# Altium PCB uTCA_MCH_PCB3.pcbdoc (part 3 of 8)
Units mm, origin at the board's own origin, x right, y up, seen from the top; angles counter-clockwise.
Board outline 182.75 x 75.8 mm, 10 copper layers (Top Layer, GND1, MidLayer1, PWR1, Mid-Layer 2, GND2, PWR2, Mid-Layer 3, GND3, Bottom Layer), stack 1.568 mm thick; 778 components, 977 nets, 4756 pads, 1214 vias.
Unrouted connection lines stored in the file: 1790.
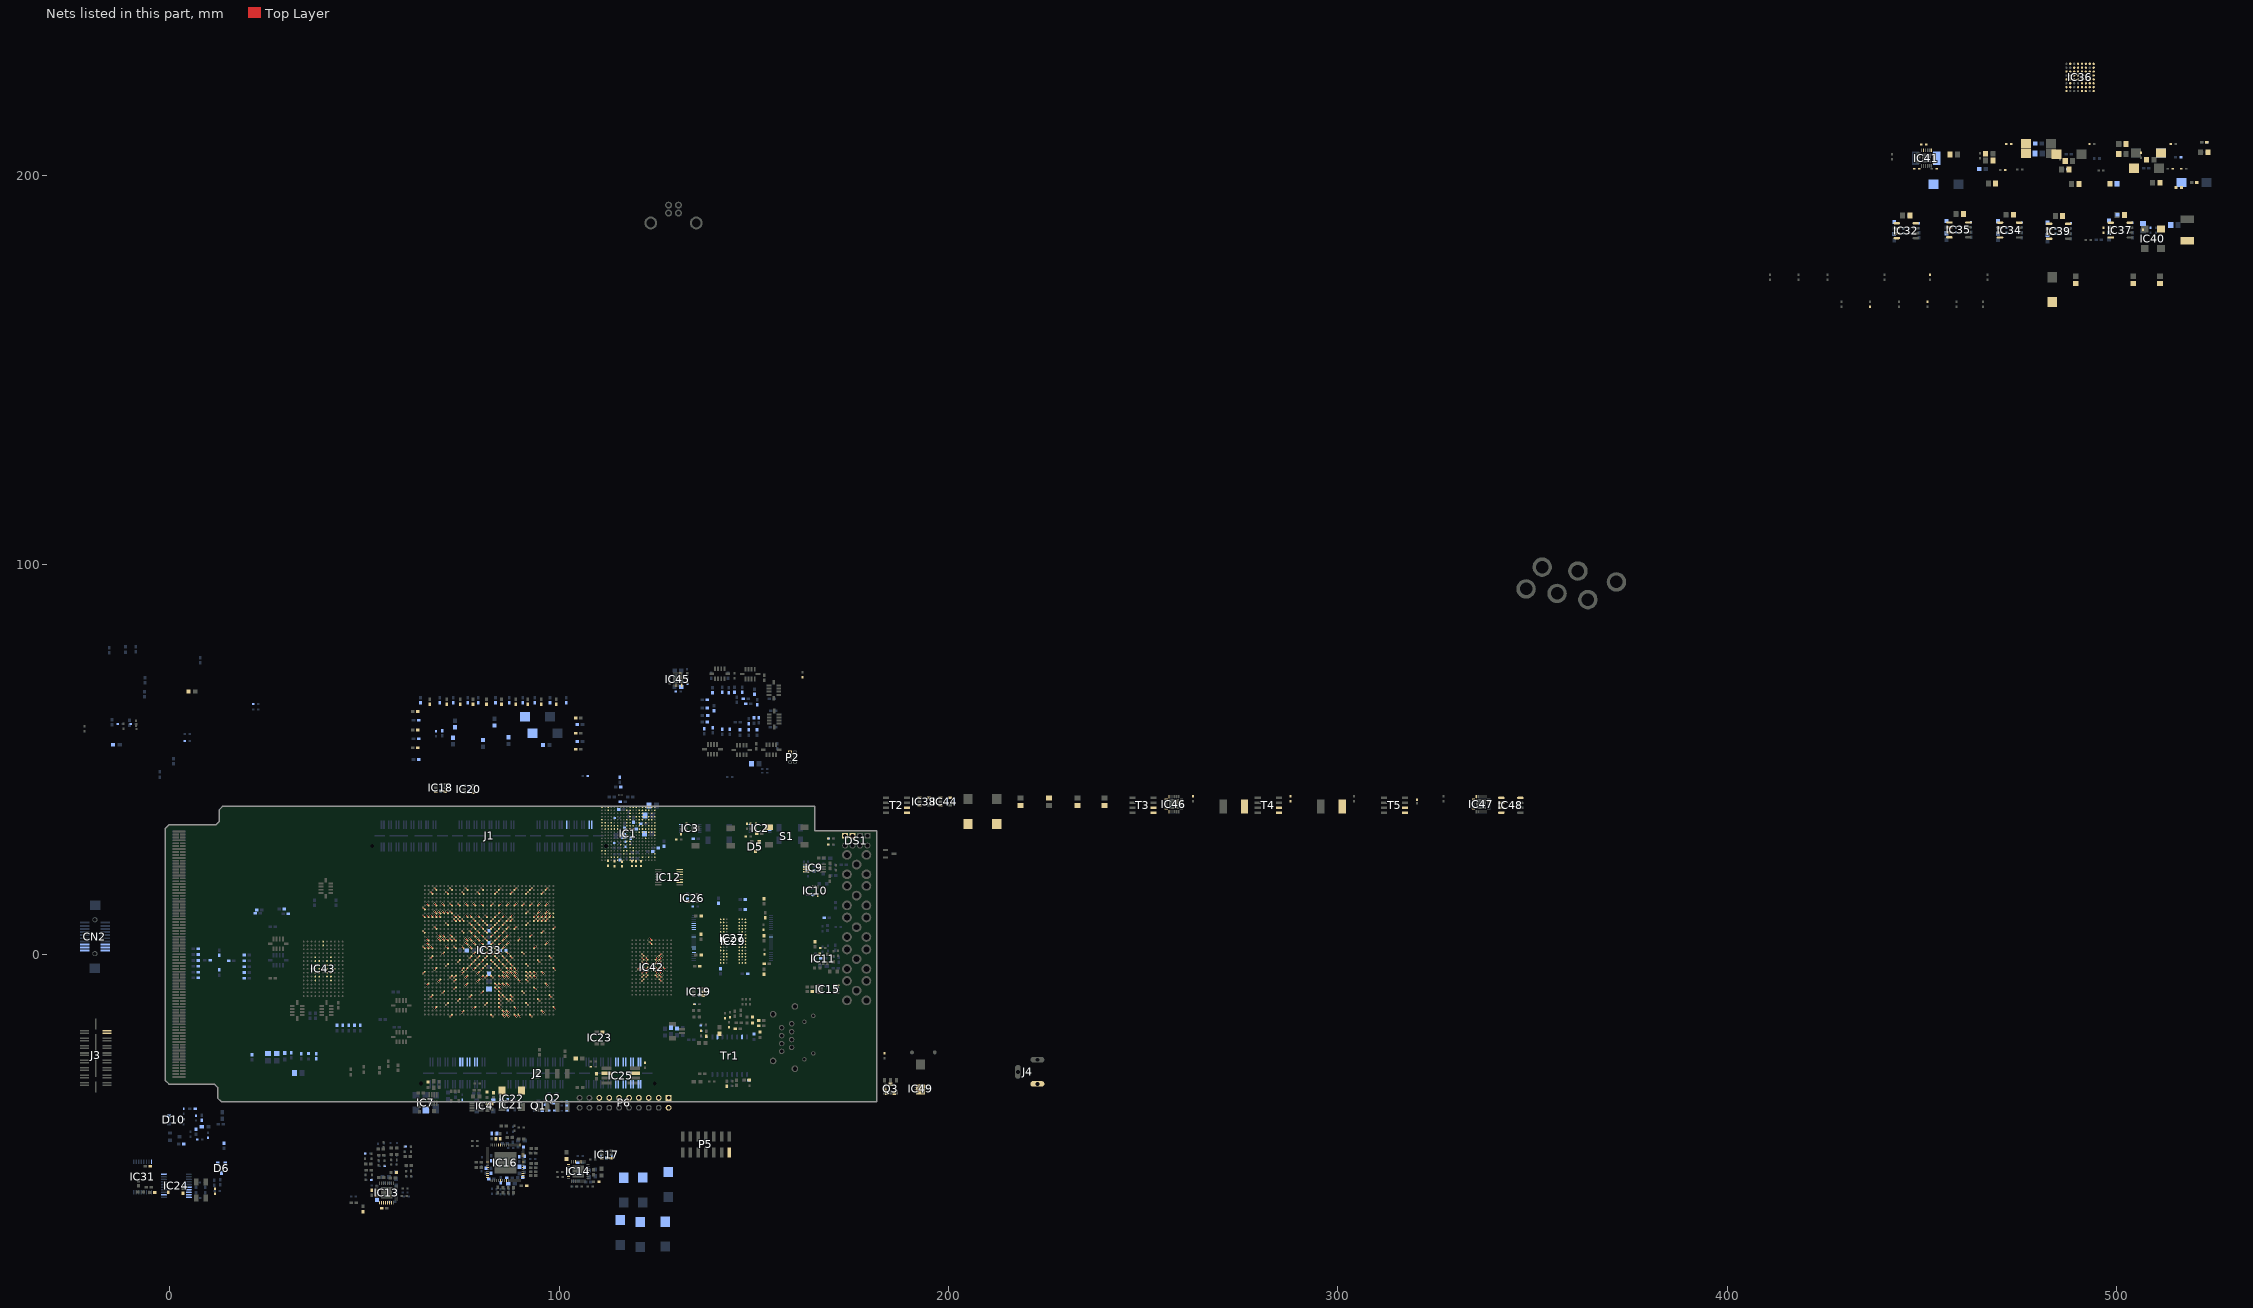
[diagram p11: the nets of this part, all layers, seen from the top]

## Footprints (in the part's own frame and the unit in brackets; to place one, negate y for a bottom-side part, rotate by r counter-clockwise, add the part's x,y. Pads: shape width x height; smd on the part's side, far side on the other; paste and mask are expansions set on the pad) (continued)
SOT-23-OT5_N [mm] "SOT23, 5-Leads, Body 2.9x1.6mm, Pitch 0.95mm, Lead Span 2.7mm, IPC Medium Density"
  rect 1.1x0.65 smd: 1(-1.2,0.95) 2(-1.2,0) 3(-1.2,-0.95) 4(1.2,-0.95) 5(1.2,0.95)
  silkscreen extent -1.32,-1.55 0.25,1.95, body extent -0.9,-1.55 0.9,1.55, height 1.45
SPXO [mm]
  rect 1.8x2 smd: 1(0,-4.2) 2(5.08,-4.2) 3(5.08,0) 4(0,0)
  silkscreen extent -1.52,-5.59 6.6,1.52
SSOP16 [mm]
  rect 1.2x0.3 smd: 1(0,0)
  oval 1.2x0.3 smd: 2(0,-0.65) 3(0,-1.3) 4(0,-1.95) 5(0,-2.6) 6(0,-3.25) 7(0,-3.9) 8(0,-4.55) 9(7.8,-4.55) 10(7.8,-3.9) 11(7.8,-3.25) 12(7.8,-2.6) 13(7.8,-1.95) 14(7.8,-1.3) 15(7.8,-0.65) 16(7.8,0)
  silkscreen extent 2.08,-4.87 5.71,0.33
SWITCH [mm] "ALCOSWITCH - FSM6JSMA - SWITCH, TACTILE, SPNO, SMD"
  rect 1.4x2.1 smd: 1(2.25,4.55) 2(2.25,-4.55) 3(-2.25,4.55) 4(-2.25,-4.55)
  silkscreen extent -3,-3 3,3, body extent -3,-3 3,3, height 3.97
TEST_PAD_1mm [mm] "SMD 1mm Test Pad"
  round 1 smd: 1(0,0)
TFBGA324 [mm]
  round 0.4 smd: A1(0,0) A2(0.8,0) A3(1.6,0) A4(2.4,0) A5(3.2,0) A6(4,0) A7(4.8,0) A8(5.6,0) A9(6.4,0) A10(7.2,0) A11(8,0) A12(8.8,0) A13(9.6,0) A14(10.4,0) A15(11.2,0) A16(12,0) A17(12.8,0) A18(13.6,0) B1(0,-0.8) B2(0.8,-0.8) B3(1.6,-0.8) B4(2.4,-0.8) B5(3.2,-0.8) B6(4,-0.8) B7(4.8,-0.8) B8(5.6,-0.8) B9(6.4,-0.8) B10(7.2,-0.8) B11(8,-0.8) B12(8.8,-0.8) B13(9.6,-0.8) B14(10.4,-0.8) B15(11.2,-0.8) B16(12,-0.8) B17(12.8,-0.8) B18(13.6,-0.8) C1(0,-1.6) C2(0.8,-1.6) C3(1.6,-1.6) C4(2.4,-1.6) C5(3.2,-1.6) C6(4,-1.6) C7(4.8,-1.6) C8(5.6,-1.6) C9(6.4,-1.6) C10(7.2,-1.6) C11(8,-1.6) C12(8.8,-1.6) C13(9.6,-1.6) C14(10.4,-1.6) C15(11.2,-1.6) C16(12,-1.6) C17(12.8,-1.6) C18(13.6,-1.6) D1(0,-2.4) D2(0.8,-2.4) D3(1.6,-2.4) D4(2.4,-2.4) D5(3.2,-2.4) D6(4,-2.4) D7(4.8,-2.4) D8(5.6,-2.4) D9(6.4,-2.4) D10(7.2,-2.4) D11(8,-2.4) D12(8.8,-2.4) D13(9.6,-2.4) D14(10.4,-2.4) D15(11.2,-2.4) D16(12,-2.4) D17(12.8,-2.4) D18(13.6,-2.4) E1(0,-3.2) E2(0.8,-3.2) E3(1.6,-3.2) E4(2.4,-3.2) E5(3.2,-3.2) E6(4,-3.2) E7(4.8,-3.2) E8(5.6,-3.2) E9(6.4,-3.2) E10(7.2,-3.2) E11(8,-3.2) E12(8.8,-3.2) E13(9.6,-3.2) E14(10.4,-3.2) E15(11.2,-3.2) E16(12,-3.2) E17(12.8,-3.2) E18(13.6,-3.2) F1(0,-4) F2(0.8,-4) F3(1.6,-4) F4(2.4,-4) F5(3.2,-4) F6(4,-4) F7(4.8,-4) F8(5.6,-4) F9(6.4,-4) F10(7.2,-4) F11(8,-4) F12(8.8,-4) F13(9.6,-4) F14(10.4,-4) F15(11.2,-4) F16(12,-4) F17(12.8,-4) F18(13.6,-4) G1(0,-4.8) G2(0.8,-4.8) G3(1.6,-4.8) G4(2.4,-4.8) G5(3.2,-4.8) G6(4,-4.8) G7(4.8,-4.8) G8(5.6,-4.8) G9(6.4,-4.8) G10(7.2,-4.8) G11(8,-4.8) G12(8.8,-4.8) G13(9.6,-4.8) G14(10.4,-4.8) G15(11.2,-4.8) G16(12,-4.8) G17(12.8,-4.8) G18(13.6,-4.8) H1(0,-5.6) H2(0.8,-5.6) H3(1.6,-5.6) H4(2.4,-5.6) H5(3.2,-5.6) H6(4,-5.6) H7(4.8,-5.6) H8(5.6,-5.6) H9(6.4,-5.6) H10(7.2,-5.6) H11(8,-5.6) H12(8.8,-5.6) H13(9.6,-5.6) H14(10.4,-5.6) H15(11.2,-5.6) H16(12,-5.6) H17(12.8,-5.6) H18(13.6,-5.6) J1(0,-6.4) J2(0.8,-6.4) J3(1.6,-6.4) J4(2.4,-6.4) J5(3.2,-6.4) J6(4,-6.4) J7(4.8,-6.4) J8(5.6,-6.4) J9(6.4,-6.4) J10(7.2,-6.4) J11(8,-6.4) J12(8.8,-6.4) J13(9.6,-6.4) J14(10.4,-6.4) J15(11.2,-6.4) J16(12,-6.4) J17(12.8,-6.4) J18(13.6,-6.4) K1(0,-7.2) K2(0.8,-7.2) K3(1.6,-7.2) K4(2.4,-7.2) K5(3.2,-7.2) K6(4,-7.2) K7(4.8,-7.2) K8(5.6,-7.2) K9(6.4,-7.2) K10(7.2,-7.2) K11(8,-7.2) K12(8.8,-7.2) K13(9.6,-7.2) K14(10.4,-7.2) K15(11.2,-7.2) K16(12,-7.2) K17(12.8,-7.2) K18(13.6,-7.2) L1(0,-8) L2(0.8,-8) L3(1.6,-8) L4(2.4,-8) L5(3.2,-8) L6(4,-8) L7(4.8,-8) L8(5.6,-8) L9(6.4,-8) L10(7.2,-8) L11(8,-8) L12(8.8,-8) L13(9.6,-8) L14(10.4,-8) L15(11.2,-8) L16(12,-8) L17(12.8,-8) L18(13.6,-8) M1(0,-8.8) M2(0.8,-8.8) M3(1.6,-8.8) M4(2.4,-8.8) M5(3.2,-8.8) M6(4,-8.8) M7(4.8,-8.8) M8(5.6,-8.8) M9(6.4,-8.8) M10(7.2,-8.8) M11(8,-8.8) M12(8.8,-8.8) M13(9.6,-8.8) M14(10.4,-8.8) M15(11.2,-8.8) M16(12,-8.8) M17(12.8,-8.8) M18(13.6,-8.8) N1(0,-9.6) N2(0.8,-9.6) N3(1.6,-9.6) N4(2.4,-9.6) N5(3.2,-9.6) N6(4,-9.6) N7(4.8,-9.6) N8(5.6,-9.6) N9(6.4,-9.6) N10(7.2,-9.6) N11(8,-9.6) N12(8.8,-9.6) N13(9.6,-9.6) N14(10.4,-9.6) N15(11.2,-9.6) N16(12,-9.6) N17(12.8,-9.6) N18(13.6,-9.6) P1(0,-10.4) P2(0.8,-10.4) P3(1.6,-10.4) P4(2.4,-10.4) P5(3.2,-10.4) P6(4,-10.4) P7(4.8,-10.4) P8(5.6,-10.4) P9(6.4,-10.4) P10(7.2,-10.4) P11(8,-10.4) P12(8.8,-10.4) P13(9.6,-10.4) P14(10.4,-10.4) P15(11.2,-10.4) P16(12,-10.4) P17(12.8,-10.4) P18(13.6,-10.4) R1(0,-11.2) R2(0.8,-11.2) R3(1.6,-11.2) R4(2.4,-11.2) R5(3.2,-11.2) R6(4,-11.2) R7(4.8,-11.2) R8(5.6,-11.2) R9(6.4,-11.2) R10(7.2,-11.2) R11(8,-11.2) R12(8.8,-11.2) R13(9.6,-11.2) R14(10.4,-11.2) R15(11.2,-11.2) R16(12,-11.2) R17(12.8,-11.2) R18(13.6,-11.2) T1(0,-12) T2(0.8,-12) T3(1.6,-12) T4(2.4,-12) T5(3.2,-12) T6(4,-12) T7(4.8,-12) T8(5.6,-12) T9(6.4,-12) T10(7.2,-12) T11(8,-12) T12(8.8,-12) T13(9.6,-12) T14(10.4,-12) T15(11.2,-12) T16(12,-12) T17(12.8,-12) T18(13.6,-12) U1(0,-12.8) U2(0.8,-12.8) U3(1.6,-12.8) U4(2.4,-12.8) U5(3.2,-12.8) U6(4,-12.8) U7(4.8,-12.8) U8(5.6,-12.8) U9(6.4,-12.8) U10(7.2,-12.8) U11(8,-12.8) U12(8.8,-12.8) U13(9.6,-12.8) U14(10.4,-12.8) U15(11.2,-12.8) U16(12,-12.8) U17(12.8,-12.8) U18(13.6,-12.8) V1(0,-13.6) V2(0.8,-13.6) V3(1.6,-13.6) V4(2.4,-13.6) V5(3.2,-13.6) V6(4,-13.6) V7(4.8,-13.6) V8(5.6,-13.6) V9(6.4,-13.6) V10(7.2,-13.6) V11(8,-13.6) V12(8.8,-13.6) V13(9.6,-13.6) V14(10.4,-13.6) V15(11.2,-13.6) V16(12,-13.6) V17(12.8,-13.6) V18(13.6,-13.6)
  silkscreen extent -0.8,-14.4 14.4,0.8
TSOP48_12x20 [mm]
  rect 1.1x0.22 smd: 1(0,0)
  oval 1.1x0.22 smd: 2(0,-0.5) 3(0,-1) 4(0,-1.5) 5(0,-2) 6(0,-2.5) 7(0,-3) 8(0,-3.5) 9(0,-4) 10(0,-4.5) 11(0,-5) 12(0,-5.5) 13(0,-6) 14(0,-6.5) 15(0,-7) 16(0,-7.5) 17(0,-8) 18(0,-8.5) 19(0,-9) 20(0,-9.5) 21(0,-10) 22(0,-10.5) 23(0,-11) 24(0,-11.5) 25(19.8,-11.5) 26(19.8,-11) 27(19.8,-10.5) 28(19.8,-10) 29(19.8,-9.5) 30(19.8,-9) 31(19.8,-8.5) 32(19.8,-8) 33(19.8,-7.5) 34(19.8,-7) 35(19.8,-6.5) 36(19.8,-6) 37(19.8,-5.5) 38(19.8,-5) 39(19.8,-4.5) 40(19.8,-4) 41(19.8,-3.5) 42(19.8,-3) 43(19.8,-2.5) 44(19.8,-2) 45(19.8,-1.5) 46(19.8,-1) 47(19.8,-0.5) 48(19.8,0)
  silkscreen extent 1.33,-11.75 18.47,0.25
TSOP65P490-8AN [mm] "TSOP, 8-Leads, Body 3x3mm, Pitch 0.65mm, IPC Medium Density"
  oval 1.7x0.45 smd: 1(-2.1,0.975) 2(-2.1,0.325) 3(-2.1,-0.325) 4(-2.1,-0.975) 5(2.1,-0.975) 6(2.1,-0.325) 7(2.1,0.325) 8(2.1,0.975)
  silkscreen extent -2.22,-1.55 0.85,1.87, body extent -1.6,-1.6 1.6,1.6, height 1.1
TSSOP20 [mil]
  rect 60x16 smd: 1(0,0)
  oval 60x16 smd: 2(0,-26) 3(0,-52) 4(0,-78) 5(0,-104) 6(0,-130) 7(0,-156) 8(0,-182) 9(0,-208) 10(0,-234) 11(252,-234) 12(252,-208) 13(252,-182) 14(252,-156) 15(252,-130) 16(252,-104) 17(252,-78) 18(252,-52) 19(252,-26) 20(252,0)
  silkscreen extent 63,-247 189,13
TYCO_ETHERNET_1888250-1 [mm]
  round 1.7 hole 1.1: 0(-8,4.726) 0(-6,10.326) 0(6,10.326) 0(8,4.726)
  round 1.4 hole 0.9: 1(-3.556,8.128) 2(-2.54,5.588) 3(-1.524,8.128) 4(-0.508,5.588) 5(0.508,8.128) 6(1.524,5.588) 7(2.54,8.128) 8(3.556,5.588)
  round 1.1 hole 0.6: 9(4.064,2.286) 10(5.588,0) 11(-5.588,2.286) 12(-4.064,0)
  silkscreen extent -8.26,-1.14 8.25,10.86
UMAX10 [mil]
  rect 40x12 smd: 1(0,0)
  oval 40x12 smd: 2(0,-19.7) 3(0,-39.4) 4(0,-59.1) 5(0,-78.8) 6(192,-78.8) 7(192,-59.1) 8(192,-39.4) 9(192,-19.7) 10(192,0)
  silkscreen extent 50,-89 142,10
USBB-G [mil] "(TME)"
  round 130 hole 90.55: 0(-180,-180) 0(280,-180)
  round 70 hole 40: 1(100,0) 2(0,0) 3(0,-80) 4(100,-80)
  silkscreen extent -180,-590 280,40
UTCA_MCH_TONGUE2_3_4 [mm] "uTCA MTCA.0 MCH tongue connector"
  rect 3.3x0.48 smd paste-1000: 1(2.35,-31.5) 7(2.35,-27) 10(2.35,-24.75) 13(2.35,-22.5) 16(2.35,-20.25) 19(2.35,-18) 22(2.35,-15.75) 25(2.35,-13.5) 28(2.35,-11.25) 31(2.35,-9) 34(2.35,-6.75) 37(2.35,-4.5) 40(2.35,-2.25) 43(2.35,0) 46(2.35,2.25) 49(2.35,4.5) 52(2.35,6.75) 55(2.35,9) 58(2.35,11.25) 61(2.35,13.5) 64(2.35,15.75) 67(2.35,18) 70(2.35,20.25) 73(2.35,22.5) 76(2.35,24.75) 79(2.35,27) 82(2.35,29.25) 85(2.35,31.5)
  rect 1.4x0.48 smd paste-1000: 2(3.3,-30.75) 3(3.3,-30) 4(3.3,-29.25) 5(3.3,-28.5) 6(3.3,-27.75) 8(3.3,-26.25) 9(3.3,-25.5) 11(3.3,-24) 12(3.3,-23.25) 14(3.3,-21.75) 15(3.3,-21) 17(3.3,-19.5) 18(3.3,-18.75) 20(3.3,-17.25) 21(3.3,-16.5) 23(3.3,-15) 24(3.3,-14.25) 26(3.3,-12.75) 27(3.3,-12) 29(3.3,-10.5) 30(3.3,-9.75) 32(3.3,-8.25) 33(3.3,-7.5) 35(3.3,-6) 36(3.3,-5.25) 38(3.3,-3.75) 39(3.3,-3) 41(3.3,-1.5) 42(3.3,-0.75) 44(3.3,0.75) 45(3.3,1.5) 47(3.3,3) 48(3.3,3.75) 50(3.3,5.25) 51(3.3,6) 53(3.3,7.5) 54(3.3,8.25) 56(3.3,9.75) 57(3.3,10.5) 59(3.3,12) 60(3.3,12.75) 62(3.3,14.25) 63(3.3,15) 65(3.3,16.5) 66(3.3,17.25) 68(3.3,18.75) 69(3.3,19.5) 71(3.3,21) 72(3.3,21.75) 74(3.3,23.25) 75(3.3,24) 77(3.3,25.5) 78(3.3,26.25) 80(3.3,27.75) 81(3.3,28.5) 83(3.3,30) 84(3.3,30.75)
  rect 1.7x0.48 smd paste-1000: 3mate(1.55,-30.75) 3mate(1.55,-30) 3mate(1.55,-29.25) 3mate(1.55,-28.5) 3mate(1.55,-27.75) 3mate(1.55,-26.25) 3mate(1.55,-25.5) 3mate(1.55,-24) 3mate(1.55,-23.25) 3mate(1.55,-21.75) 3mate(1.55,-21) 3mate(1.55,-19.5) 3mate(1.55,-18.75) 3mate(1.55,-17.25) 3mate(1.55,-16.5) 3mate(1.55,-15) 3mate(1.55,-14.25) 3mate(1.55,-12.75) 3mate(1.55,-12) 3mate(1.55,-10.5) 3mate(1.55,-9.75) 3mate(1.55,-8.25) 3mate(1.55,-7.5) 3mate(1.55,-6) 3mate(1.55,-5.25) 3mate(1.55,-3.75) 3mate(1.55,-3) 3mate(1.55,-1.5) 3mate(1.55,-0.75) 3mate(1.55,0.75) 3mate(1.55,1.5) 3mate(1.55,3) 3mate(1.55,3.75) 3mate(1.55,5.25) 3mate(1.55,6) 3mate(1.55,7.5) 3mate(1.55,8.25) 3mate(1.55,9.75) 3mate(1.55,10.5) 3mate(1.55,12) 3mate(1.55,12.75) 3mate(1.55,14.25) 3mate(1.55,15) 3mate(1.55,16.5) 3mate(1.55,17.25) 3mate(1.55,18.75) 3mate(1.55,19.5) 3mate(1.55,21) 3mate(1.55,21.75) 3mate(1.55,23.25) 3mate(1.55,24) 3mate(1.55,25.5) 3mate(1.55,26.25) 3mate(1.55,27.75) 3mate(1.55,28.5) 3mate(1.55,30) 3mate(1.55,30.75)
  rect 1.7x0.48 smd far side paste-1000: 3mate(1.55,-30.75) 3mate(1.55,-30) 3mate(1.55,-29.25) 3mate(1.55,-28.5) 3mate(1.55,-27.75) 3mate(1.55,-26.25) 3mate(1.55,-25.5) 3mate(1.55,-24) 3mate(1.55,-23.25) 3mate(1.55,-21.75) 3mate(1.55,-21) 3mate(1.55,-19.5) 3mate(1.55,-18.75) 3mate(1.55,-17.25) 3mate(1.55,-16.5) 3mate(1.55,-15) 3mate(1.55,-14.25) 3mate(1.55,-12.75) 3mate(1.55,-12) 3mate(1.55,-10.5) 3mate(1.55,-9.75) 3mate(1.55,-8.25) 3mate(1.55,-7.5) 3mate(1.55,-6) 3mate(1.55,-5.25) 3mate(1.55,-3.75) 3mate(1.55,-3) 3mate(1.55,-1.5) 3mate(1.55,-0.75) 3mate(1.55,0.75) 3mate(1.55,1.5) 3mate(1.55,3) 3mate(1.55,3.75) 3mate(1.55,5.25) 3mate(1.55,6) 3mate(1.55,7.5) 3mate(1.55,8.25) 3mate(1.55,9.75) 3mate(1.55,10.5) 3mate(1.55,12) 3mate(1.55,12.75) 3mate(1.55,14.25) 3mate(1.55,15) 3mate(1.55,16.5) 3mate(1.55,17.25) 3mate(1.55,18.75) 3mate(1.55,19.5) 3mate(1.55,21) 3mate(1.55,21.75) 3mate(1.55,23.25) 3mate(1.55,24) 3mate(1.55,25.5) 3mate(1.55,26.25) 3mate(1.55,27.75) 3mate(1.55,28.5) 3mate(1.55,30) 3mate(1.55,30.75)
  rect 3.3x0.48 smd far side paste-1000: 86(2.35,31.5) 89(2.35,29.25) 92(2.35,27) 95(2.35,24.75) 98(2.35,22.5) 101(2.35,20.25) 104(2.35,18) 107(2.35,15.75) 110(2.35,13.5) 113(2.35,11.25) 116(2.35,9) 119(2.35,6.75) 122(2.35,4.5) 125(2.35,2.25) 128(2.35,0) 131(2.35,-2.25) 134(2.35,-4.5) 137(2.35,-6.75) 140(2.35,-9) 143(2.35,-11.25) 146(2.35,-13.5) 149(2.35,-15.75) 152(2.35,-18) 155(2.35,-20.25) 158(2.35,-22.5) 161(2.35,-24.75) 164(2.35,-27) 170(2.35,-31.5)
  rect 1.4x0.48 smd far side paste-1000: 87(3.3,30.75) 88(3.3,30) 90(3.3,28.5) 91(3.3,27.75) 93(3.3,26.25) 94(3.3,25.5) 96(3.3,24) 97(3.3,23.25) 99(3.3,21.75) 100(3.3,21) 102(3.3,19.5) 103(3.3,18.75) 105(3.3,17.25) 106(3.3,16.5) 108(3.3,15) 109(3.3,14.25) 111(3.3,12.75) 112(3.3,12) 114(3.3,10.5) 115(3.3,9.75) 117(3.3,8.25) 118(3.3,7.5) 120(3.3,6) 121(3.3,5.25) 123(3.3,3.75) 124(3.3,3) 126(3.3,1.5) 127(3.3,0.75) 129(3.3,-0.75) 130(3.3,-1.5) 132(3.3,-3) 133(3.3,-3.75) 135(3.3,-5.25) 136(3.3,-6) 138(3.3,-7.5) 139(3.3,-8.25) 141(3.3,-9.75) 142(3.3,-10.5) 144(3.3,-12) 145(3.3,-12.75) 147(3.3,-14.25) 148(3.3,-15) 150(3.3,-16.5) 151(3.3,-17.25) 153(3.3,-18.75) 154(3.3,-19.5) 156(3.3,-21) 157(3.3,-21.75) 159(3.3,-23.25) 160(3.3,-24) 162(3.3,-25.5) 163(3.3,-26.25) 165(3.3,-27.75) 166(3.3,-28.5) 167(3.3,-29.25) 168(3.3,-30) 169(3.3,-30.75)
  rect 1.4x0.48 on Bottom Solder paste-1000: 138(3.3,-7.5)
VCTCXO_VM53S [mm]
  rect 1.2x1.2 smd: 1(-0.6,0.6) 2(3.6,0.6) 3(3.6,3.2) 4(-0.6,3.2)
  silkscreen extent -1.6,-0.4 4.6,4.2
vs-705 [mm]
  rect 1.68x2.34 smd: 1(-0.025,1.168)
  rect 1.68x1.7 smd: 2(2.54,0.838) 3(5.055,0.838) 4(5.055,4.674) 5(2.515,4.674) 6(-0.025,4.674)
  silkscreen extent -1.65,0.46 6.71,4.98
XTAL_32k [mm]
  round 0.5 hole 0.25: 1(-0.35,0) 2(0.35,0)
  silkscreen extent -0.7,-0.7 0.7,0.7
XTALL_ABM3 [mm] "Abracon ABM3 xtal series"
  rect 1.8x1.2 smd: 1(0,0) 2(4,0) 3(4,2.4) 4(0,2.4)
  silkscreen extent -1.05,-0.75 5.05,3.15

## Part data
C1 C2 C3 C4 C75 C76 C85 C86 C247 C263 C266 C268 C269 C270 C271 C283 C285 C292 C294 C295 C296 C297 C300 C301 C302 C311 C429 C430 C431 C432: library part CC0805_22UF_6.3V_20%_X5R, "Capacitor"
C5 C6 C7 C8 C9 C10 C11 C12 C13 C14 C15 C16 C17 C18 C27 C28 C29 C30 C31 C33 C34 C37 C38 C40 C41 C43 C45 C47 C49 C50 C51 C52 C56 C57 C59 C62 C63 C65 C66 C100 C141 C142 C143 C146 C147 C148 C149 C150 C152 C153 C159 C160 C162 C165 C169 C171 C172 C173 C174 C176 C177 C178 C180 C181 C183 C184 C186 C187 C191 C192 C193 C194 C201 C207 C208 C209 C210 C212 C213 C215 C216 C217 C218 C219 C220 C221 C222 C223 C224 C225 C226 C227 C228 C229 C230 C231 C232 C233 C234 C240 C241 C242 C243 C244 C253 C261 C293 C309 C337 C338 C339 C340 C341 C342 C343 C344 C345 C346 C347 C348 C361 C362 C363 C364 C365 C366 C367 C368 C369 C370 C371 C372 C377 C378 C379 C380 C381 C382 C383 C384 C385 C386 C387 C388 C389 C390 C391 C392 C396 C397 C406 C407 C408 C409 C410 C411 C412 C413: library part CC0402_100NF_16V_10%_X7R, "Capacitor"
C19 C20: library part CC0402_15PF_50V_5%_NP0, "Capacitor"
C21 C22: library part CC0402_22PF_50V_5%_NP0, "Capacitor"
C23 C163 C349 C350 C351 C352 C373 C374 C375 C376 C395: library part CC0402_1NF_25V_10%_X7R, "Capacitor"
C24 C58 C88 C89 C90 C99 C101 C102 C103 C122 C125 C138 C139 C154 C179 C182 C185 C188 C189 C190 C195 C196 C197 C198 C199 C200: library part CC0402_10NF_25V_10%_X7R, "Capacitor"
C25 C206: library part CC0402_470PF_50V_10%_X7R, "Capacitor"
C26: library part CC0402_4.7NF_25V_10%_X7R, "Capacitor"
C32 C35 C36 C39 C42 C48 C55 C64 C140 C144 C145 C151 C155 C156 C157 C158 C161 C167 C175 C203 C211 C393 C394 C414 C415 C416: library part CC0603_10UF_6.3V_20%_X5R, "Capacitor"
C44 C46 C53 C54: library part CC0402_47NF_25V_10%_X7R, "Capacitor"
C60 C69 C70 C73 C83 C87: library part CC0402_470NF_16V_10%_X5R, "Capacitor"
C61 C235 C236 C237 C250 C251 C252 C272 C281 C329 C330 C331 C332 C353 C354 C355 C356 C398 C399 C400 C405: library part CC0402_1UF_16V_10%_X5R, "Capacitor"
C67: library part CC0402_O.C., "Capacitor"
C68 C71 C72 C74 C84 C91 C92 C93 C94 C95 C96 C238 C246 C255 C256 C264 C267 C273 C274 C275 C276 C277 C286 C287 C298 C299 C303 C304 C312 C322 C323 C417: library part CC0603_4.7UF_10V_10%_X5R, "Capacitor"
C77 C78 C79 C80 C81 C82 C97 C98: library part CP2917_330UF_6.3V_20%_TANT, "Polarized Capacitor Tantalum"
C104 C105 C106 C107 C108 C109 C110 C111 C112 C113 C114 C115 C116 C117 C118 C119 C120 C121 C123 C124 C126 C127 C128 C129 C130 C131 C132 C133 C134 C135 C136 C137 C168: library part CC0402_220NF_16V_10%_X7R, "Capacitor"
C164: library part CC0402_33PF_50V_5%_NP0, "Capacitor"
C166 C202 C204 C205: library part CC0402_10PF_50V_5%_NP0, "Capacitor"
C170: library part CC0402_68PF_50V_5%_NP0, "Capacitor"
C214: library part CC0603_100NF_50V_10%_X7R, "Capacitor"
C239 C248 C254 C257 C278 C279 C305 C306: library part CC0805_22UF_16V_10%_X5R, "Capacitor"
C245 C262 C265 C282 C284 C310: library part CC0402_2.7NF_50V_10%_X7R, "Capacitor"
C249 C258 C280 C307: library part CP2917_220UF_10V_20%_TANT, "Polarized Capacitor Tantalum"
C259 C260 C288 C289 C290 C291 C427 C428: library part CP2917_220UF_6.3V_20%_TANT, "Polarized Capacitor Tantalum"
C333 C334 C335 C336 C357 C358 C359 C360 C401 C402 C403 C404 C418 C419 C420 C421: library part CC0402_22NF_25V_10%_X7R, "Capacitor"
CN1: library part CON_ETHERNET_TYCO_1888250-1, "low profile uTCA Ethernet jack (RJ45)"
CN2: library part KX15_20p, "multipin B2B connector (plug)"
CN3: library part CON_SH_CRIMP_1MM_2
CN4: "microTCA MTCA.0 standard MCH connector 3"
CON1: library part CON_USB_B, "USB Receptacle Type B Right Angle"
D1 D2 D3 D4: library part Diode, "Default Diode"
D5 D6 D9 D10: library part BAT54A.1, "Schottky Barrier Double Diode"
D7 D8: "Silicon Switching Diode Array for High-Speed Switching"
DS1: library part LED_ARRAYX4.1, "4x Green Led Array"
IC1: library part AT91SAM9263, "Atmel ARM926 MCU"
IC2 IC3: "I2C, 32 BIT BINARY COUNTER WATCHDOG RTC"
IC4: library part VCTCXO_VM53S, "VCTCXO oscillator"
IC5 IC8: library part AD5662BRJ, "Analog Devices 16-bit DAC w/SPI interface, ext ref"
IC6: "10mA Ultra-Low Quiescent Current uCap LDO"
IC7: library part VCXO_CFPV_45, "VCXO oscillator"
IC9: "ONSemi differental receiver w/ECL output"
IC10: library part AD8541, "Analog Devices general purpose low-voltage R2R CMOS opamp"
IC11: library part ADCMP600, "Analog Devices fast comparator"
IC12: "Quad Buffer with 3-State Outputs with TTL Compatible Inputs"
IC13 IC14: library part CDCM61002, "Low Jitter Clock Generator, Two Outpust, Integrated VCO"
IC15: library part MC100EPT21, "ONSemi LVDS/LVPECL -> LVTTL/LVCMOS buffer"
IC16: library part AD9516, "PLL with clock fanout"
IC17 IC18 IC19 IC20: "I2C temp. sensor"
IC21: "Single High Speed Differential Driver"
IC22 IC40: library part OSC_CFPS-73, "SMD oscillator 3.3V (Elfa)"
IC23: library part IVT32000C
IC24: library part TXB0108, "8-Bit Bidirectional Voltage-Level Translator with Auto-Direction Sensing"
IC25: library part AT45DB642D, "64-megabit 2.7V, Dual-Interface DataFlash"
IC26: "TI single OR gate"
IC27: "NAND Flash 512Mx8, 3.3V Asynch/Page"
IC28: "Micropower Voltage Reference Diode"
IC29: library part IS42S32160B-BGA, "SDRAM 512MBit (16Mx32) 133MHz BGA-90"
IC31: library part IFC_MAX3232
IC32 IC34 IC35 IC37 IC39 IC48: library part AP7173, "1.5A Low Dropout Linera Regulator"
IC33: "Virtex-6 LXT Platform FPGA, 600 User I/Os, 20 GTXs, 1156-Ball FFBGA, Speed Grade 1, Commercial Grade"
IC36: "NOR Flash Memory, 256Mbit"
IC38 IC44: "300 mA, High PSRR, Low Quiescent Current LDO, 5-Pin SOT-23, Industrial Temperature, Tape and Reel"
IC41: "RMII ethernet transceiver with auto MIDIX"
IC42 IC43: library part CY7C1314CV18, "18-Mbit (512Kx36) QDRII SRAM 2-Word Burst Architecture"
IC45: library part TPS51200, "Sink/Source DDR Termination Regulator"
IC46 IC47: "Dual Synchronous Step-Down Controller For Low Voltage Power Rails"
IC49: "1.0 Gbps LVDS Buffer/Repeater"
J4: library part PWR_JACK, "Power Jack 5A @ 12V"
L1 L2 L3 L4 L5 L6 L7 L8 L9 L10 L12: library part L_FERRITE_BEAD, "ferrite bead"
L11 L13 L14 L15: library part Inductor, "Low Profile, High Current Inductor"
P1 P3 P4 P7 P8: library part SMB, "SMB Straight Connector"
P2: "Header, 3-Pin, Dual row"
P5: "Header, 7-Pin, Dual row"
P6: "Header, 10-Pin, Dual row"
Q1 Q3: "N-Channel Logic Level Enhancement Mode Field Effect Transistor"
Q2: library part BSS84-7-F, "P-Channel Logic Level Enhancement Mode Field Effect Transistor"
R1 R4 R21 R61 R65 R69 R71 R72 R74 R75 R140 R141 R148 R149 R150 R152 R153 R158 R179 R183 R187 R192 R210 R233: library part R0402_0R_0.1W_JUMPER, "SMD Resistor"
R2 R3 R51 R52 R53 R60 R62 R63 R64 R66 R67 R68 R70 R73 R164 R227 R235: library part R0402_O.C., "SMD Resistor"
R5 R159 R186 R236: library part R0402_1K5_±1%_0.1W_100PPM, "SMD Resistor"
R6: library part R0402_2K_±1%_0.1W_100PPM, "SMD Resistor"
R7 R8 R9 R10 R28: library part R0402_100K_±1%_0.1W_100PPM, "SMD Resistor"
R11 R29 R30 R35 R37 R106 R128 R129 R138 R165 R166 R167 R168 R169 R170 R181 R188 R190 R191 R199 R207 R211 R212 R213 R214 R231 R234 R238 R242: library part R0402_10K_±1%_0.1W_100PPM, "SMD Resistor"
R12 R13 R14 R15 R16 R17 R18 R19 R45 R47 R48 R49 R50 R54 R55 R56 R57 R58 R100 R102 R107 R110 R111 R117 R120 R122 R126 R132 R134 R185 R189 R195 R200 R201 R202 R203 R208 R209 R229 R232 R237 R239 R240 R243: library part R0402_4.7K_±1%_0.1W_100PPM, "SMD Resistor"
R20 R22 R27 R33 R42 R145: library part R0402_470R_±1%_0.1W_100PPM, "SMD Resistor"
R23 R24 R76 R78 R81 R82 R84 R85 R87 R88 R89 R91 R92 R93 R182 R184: library part R0402_200R_±1%_0.1W_100PPM, "SMD Resistor"
R25 R26 R31 R32 R39 R43 R44 R59 R90: library part R0402_100R_±1%_0.1W_100PPM, "SMD Resistor"
R34 R41 R77 R172 R173: library part R0603_33R_±1%_0.25W_100PPM, "SMD Resistor"
R36 R38 R217 R219 R221 R222 R226: library part R0402_2K2_±1%_0.1W_100PPM, "SMD Resistor"
R40 R154 R155 R156 R157: library part R0603_49R9_±1%_0.25W_100PPM, "SMD Resistor"
R46: library part R0402_330R_±1%_0.1W_100PPM, "SMD Resistor"
R79: library part R0402_820R_±1%_0.1W_100PPM, "SMD Resistor"
R80: library part R0402_390R_±1%_0.1W_100PPM, "SMD Resistor"
R83 R98 R99 R108 R109 R118 R119 R130 R131 R204: library part R0402_4K12_±1%_0.1W_100PPM, "SMD Resistor"
R86: library part R0402_5K1_±1%_0.1W_100PPM, "SMD Resistor"
R94 R95 R96 R97: library part R0402_49R9_±1%_0.1W_100PPM, "SMD Resistor"
R101 R103 R104 R105 R112 R113 R114 R115 R121 R123 R124 R125 R133 R135 R136 R137 R160 R161 R162 R163 R193 R194 R205 R218 R220 R223 R224 R225: library part R0402_1K_±1%_0.1W_100PPM, "SMD Resistor"
R116 R127 R139 R176 R206: library part R0402_22K_±1%_0.1W_100PPM, "SMD Resistor"
R142 R143 R144 R146 R147 R151: library part R0402_33R_±1%_0.1W_100PPM, "SMD Resistor"
R171 R174: library part R0402_330K_±1%_0.1W_100PPM, "SMD Resistor"
R175: library part R0402_30K_±1%_0.1W_100PPM, "SMD Resistor"
R177: library part R0402_300R_±1%_0.1W_100PPM, "SMD Resistor"
R178 R196: library part R0402_4K87_±1%_0.1W_100PPM, "SMD Resistor"
R180 R198: library part R0402_2K43_±1%_0.1W_100PPM, "SMD Resistor"
R197: library part R0402_12K1_±1%_0.1W_100PPM, "SMD Resistor"
R215 R216: library part R0402_249R_±1%_0.1W_100PPM, "SMD Resistor"
R228: library part R0402_9K31_±1%_0.1W_100PPM, "SMD Resistor"
R230: library part R0402_2K8_±1%_0.1W_100PPM, "SMD Resistor"
R241: library part R0402_13K_1%_0.0625W_100PPM, "Resistor - 1%"
RP1 RP2 RP3 RP4 RP5 RP6 RP7 RP8 RP9 RP10 RP11 RP12 RP13 RP14: library part EXB-E10C470J, "47R, 62.5mW Chip Resistor Bussed Network"
S1 S2: library part SW-PB, "Push button"
S3: library part SW-DIP4, "4 Positions DIP SWITCH"
T2 T3 T4 T5: "Dual SO-8 MOSFET For POL Cconverter"
TP1 TP2: library part TEST_POINT, "SMD 1mm Test Point"
Tr1: "ethernet trafo (TME)"
Tr2: "SMT Mini WideBand Transformer 1:1, 10uH,"
X1: library part XTAL, "Crystal Oscillator"
X2: library part X_CRYSTAL_SMD_ABM8, "Miniature crystal oscillator (ABRACON)"
X3 X4: library part ECSXTAL, "Crystal 32.768 Hz 6,0pF SMD"

## Free pads (board coordinates)
  round 5 hole 3.2 unplated: ""(348.3,93.8) ""(352.45,99.4) ""(356.25,92.65) ""(361.6,98.4) ""(364.15,91.05) ""(371.5,95.6)

## Via types
v1: diameter 0.5, hole 0.2, Top Layer to Bottom Layer, 1149 vias
v2: diameter 0.508, hole 0.254, Top Layer to Bottom Layer, 32 vias
v3: diameter 0.66, hole 0.33, Top Layer to Bottom Layer, tented top, 29 vias
v4: diameter 0.5, hole 0.2, Top Layer to Bottom Layer, tented top, 4 vias

## Nets (pads, with @x,y where several pads share a name; then routed paths per layer and width w, separated by ;. In a path a pad name is that pad's centre, name@x,y a point inside that pad or via, vN(x,y) a via of type N, cw(c..) or ccw(c..) an arc to the next point about the centre after c; other vN are vias at no path point)
5VBUSMONITORING: IC1.A10 R175.2 R176.2
+1V0: C69.2 C70.2 C71.1 C72.1 C77.1 C78.1 C79.1 C80.1 C81.1 C82.1 C427.1 C428.1 C429.1 C430.2 C431.1 C432.1 D4.2 IC33.AA12 IC33.AA14 IC33.AA16 IC33.AA18 IC33.AA20 IC33.AB11 IC33.AB13 IC33.AB15 IC33.AB17 IC33.AB19 IC33.AB21 IC33.M19 IC33.M21 IC33.N12 IC33.N14 IC33.N16 IC33.N18 IC33.N20 IC33.P11 IC33.P13 IC33.P15 IC33.P17 IC33.P19 IC33.P21 IC33.R10 IC33.R12 IC33.R14 IC33.R16 IC33.R18 IC33.R20 IC33.T11 IC33.T13 IC33.T15 IC33.T19 IC33.T21 IC33.U10 IC33.U12 IC33.U14 IC33.U16 IC33.U20 IC33.V11 IC33.V13 IC33.V15 IC33.V19 IC33.V21 IC33.W12 IC33.W14 IC33.W16 IC33.W20 IC33.Y11 IC33.Y13 IC33.Y15 IC33.Y17 IC33.Y19 IC33.Y21 IC46.1 L13.2 R230.2 | length 38.9
  Top Layer w0.32: v1(77,-3) IC33.AB21@77.5,-2.5 ; v1(77,-1) IC33.AB19@77.5,-0.5 ; v1(77,2) IC33.AB17@77.5,1.5 ; v1(77,4) IC33.AB15@77.5,3.5 ; v1(77,6) IC33.AB13@77.5,5.5 ; v1(77,8) IC33.AB11@77.5,7.5 ; v1(78,-2) IC33.AA20@78.5,-1.5 ; v1(78,0) IC33.AA18@78.5,0.5 ; v1(78,3) IC33.AA16@78.5,2.5 ; v1(78,5) IC33.AA14@78.5,4.5 ; v1(78,7) IC33.AA12@78.5,6.5 ; v1(79,-3) IC33.Y21@79.5,-2.5 ; v1(79,-1) IC33.Y19@79.5,-0.5 ; v1(79,2) IC33.Y17@79.5,1.5 ; v1(79,4) IC33.Y15@79.5,3.5 ; v1(79,6) IC33.Y13@79.5,5.5 ; v1(79,8) IC33.Y11@79.5,7.5 ; v1(80,-2) IC33.W20@80.5,-1.5 ; v1(80,3) IC33.W16@80.5,2.5 ; v1(80,5) IC33.W14@80.5,4.5 ; v1(80,7) IC33.W12@80.5,6.5 ; v1(81,-3) IC33.V21@81.5,-2.5 ; v1(81,-1) IC33.V19@81.5,-0.5 ; v1(81,4) IC33.V15@81.5,3.5 ; v1(81,6) IC33.V13@81.5,5.5 ; v1(81,8) IC33.V11@81.5,7.5 ; IC33.U20@82.5,-1.5 v1(83,-2) ; IC33.U16@82.5,2.5 v1(83,3) ; IC33.U14@82.5,4.5 v1(83,5) ; IC33.U12@82.5,6.5 v1(83,7) ; IC33.U10@82.5,8.5 v1(83,9) ; IC33.T21@83.5,-2.5 v1(84,-3) ; IC33.T19@83.5,-0.5 v1(84,-1) ; IC33.T15@83.5,3.5 v1(84,4) ; IC33.T13@83.5,5.5 v1(84,6) ; IC33.T11@83.5,7.5 v1(84,8) ; IC33.R20@84.5,-1.5 v1(85,-2) ; IC33.R18@84.5,0.5 v1(85,0) ; IC33.R16@84.5,2.5 v1(85,3) ; IC33.R14@84.5,4.5 v1(85,5) ; IC33.R12@84.5,6.5 v1(85,7) ; IC33.R10@84.5,8.5 v1(85,9) ; IC33.P21@85.5,-2.5 v1(86,-3) ; IC33.P19@85.5,-0.5 v1(86,-1) ; IC33.P17@85.5,1.5 v1(86,2) ; IC33.P15@85.5,3.5 v1(86,4) ; IC33.P13@85.5,5.5 v1(86,6) ; IC33.P11@85.5,7.5 v1(86,8) ; IC33.N20@86.5,-1.5 v1(87,-2) ; IC33.N18@86.5,0.5 v1(87,0) ; IC33.N16@86.5,2.5 v1(87,3) ; IC33.N14@86.5,4.5 v1(87,5) ; IC33.N12@86.5,6.5 v1(87,7) ; IC33.M21@87.5,-2.5 v1(88,-3) ; IC33.M19@87.5,-0.5 v1(88,-1)
+1V0_GTX: C91.2 C92.2 C93.2 C97.1 C104.2 C106.2 C108.2 C110.2 C112.2 C114.2 C116.2 C118.2 C120.2 C123.2 C126.2 C128.2 C130.2 C132.2 C134.2 C136.2 C311.2 C312.2 IC33.AA6 IC33.AC6 IC33.AE6 IC33.AG6 IC33.AJ6 IC33.AL6 IC33.AN6 IC33.C6 IC33.E6 IC33.G6 IC33.J6 IC33.L6 IC33.N6 IC33.R6 IC33.U6 IC33.W6 IC39.8 R126.2 R205.2 | length 11.3
  Top Layer w0.32: v1(66,13) IC33.AN6@66.5,12.5 ; v1(68,13) IC33.AL6@68.5,12.5 ; v1(70,13) IC33.AJ6@70.5,12.5 ; v1(72,13) IC33.AG6@72.5,12.5 ; v1(74,13) IC33.AE6@74.5,12.5 ; v1(76,13) IC33.AC6@76.5,12.5 ; v1(78,13) IC33.AA6@78.5,12.5 ; v1(80,13) IC33.W6@80.5,12.5 ; IC33.U6@82.5,12.5 v1(83,13) ; IC33.R6@84.5,12.5 v1(85,13) ; IC33.N6@86.5,12.5 v1(87,13) ; IC33.L6@88.5,12.5 v1(89,13) ; IC33.J6@90.5,12.5 v1(91,13) ; IC33.G6@92.5,12.5 v1(93,13) ; IC33.E6@94.5,12.5 v1(95,13) ; IC33.C6@96.5,12.5 v1(97,13)
+1V0_GTX_PG: IC33.AG15 IC39.2 R207.2 | length 0.7
  Top Layer w0.32: v1(72,4) IC33.AG15@72.5,3.5
+1V2_CPU: C2.2 C5.1 C6.1 C7.1 C285.2 C286.2 IC1.A16 IC1.H10 IC1.V1 IC37.8 R2.2 R107.2 R198.2
+1V2_CPU_PG: IC33.AH15 IC37.2 IC47.24 IC48.4 R195.1 | length 0.7
  Top Layer w0.32: v1(71,4) IC33.AH15@71.5,3.5
+1V2_GTX: C94.2 C95.2 C96.2 C98.1 C100.2 C105.1 C107.1 C109.1 C111.1 C113.1 C115.1 C117.1 C119.1 C121.1 C124.1 C127.1 C129.1 C131.1 C133.1 C135.1 C137.1 C246.2 C247.2 IC32.8 IC33.AC2 IC33.AD3 IC33.AG2 IC33.AH3 IC33.AL2 IC33.AM3 IC33.AP7 IC33.C2 IC33.D3 IC33.G2 IC33.H3 IC33.L2 IC33.M3 IC33.R2 IC33.T3 IC33.W2 IC33.Y3 R59.1 R117.2 R180.2 | length 12
  Top Layer w0.32: v1(65,12) IC33.AP7@65.5,11.5 ; v1(67,16) IC33.AM3@67.5,15.5 ; v1(68,17) IC33.AL2@68.5,16.5 ; v1(71,16) IC33.AH3@71.5,15.5 ; v1(72,17) IC33.AG2@72.5,16.5 ; v1(75,16) IC33.AD3@75.5,15.5 ; v1(76,17) IC33.AC2@76.5,16.5 ; v1(79,16) IC33.Y3@79.5,15.5 ; v1(80,17) IC33.W2@80.5,16.5 ; IC33.T3@83.5,15.5 v1(84,16) ; IC33.R2@84.5,16.5 v1(85,17) ; IC33.M3@87.5,15.5 v1(88,16) ; IC33.L2@88.5,16.5 v1(89,17) ; IC33.H3@91.5,15.5 v1(92,16) ; IC33.G2@92.5,16.5 v1(93,17) ; IC33.D3@95.5,15.5 v1(96,16) ; IC33.C2@96.5,16.5 v1(97,17)
+1V2_GTX_PG: IC32.2 IC33.AJ14 R181.2 | length 0.7
  Top Layer w0.32: v1(70,5) IC33.AJ14@70.5,4.5
+1V5: C256.1 C290.1 C291.1 C292.1 C297.2 C300.1 C301.1 C323.1 IC32.1 IC39.1 IC46.6 L11.2 R106.2 R228.1
+1V8: C1.2 C13.1 C16.1 C17.1 C28.2 C62.2 C63.2 C73.1 C74.2 C75.2 C76.2 C210.2 C211.2 C288.1 C289.1 C294.1 C295.2 C296.1 C302.1 C329.2 C330.2 C331.2 C332.2 C333.2 C334.2 C335.2 C336.2 C337.1 C338.1 C339.1 C340.1 C341.1 C342.1 C343.1 C344.1 C345.1 C346.1 C347.1 C348.1 C349.2 C350.2 C351.2 C352.2 C353.2 C354.2 C355.2 C356.2 C357.2 C358.2 C359.2 C360.2 C361.1 C362.1 C363.1 C364.1 C365.1 C366.1 C367.1 C368.1 C369.1 C370.1 C371.1 C372.1 C373.2 C374.2 C375.2 C376.2 C393.2 C394.2 IC1.L8 IC1.L9 IC1.M10 IC1.M13 IC1.T2 IC3.10 IC33.A22 IC33.A32 IC33.AD13 IC33.AE20 IC33.AG14 IC33.AH11 IC33.AH21 IC33.AJ28 IC33.AK25 IC33.AL12 IC33.AL22 IC33.AM19 IC33.AM29 IC33.AN26 IC33.AP13 IC33.AP23 IC33.B19 IC33.B29 IC33.C16 IC33.C26 IC33.D23 IC33.D33 IC33.E20 IC33.E30 IC33.F17 IC33.F27 IC33.G34 IC33.H21 IC33.H31 IC33.J18 IC33.J28 IC33.K15 IC33.K25 IC33.L32 IC33.M29 IC33.N26 IC33.P33 IC33.R30 IC36.A6 IC36.H3 IC41.9 IC42.E4 IC42.E8 IC42.F4 IC42.F5 IC42.F7 IC42.F8 IC42.G4 IC42.G5 IC42.G7 IC42.G8 IC42.H3 IC42.H4 IC42.H5 IC42.H7 IC42.H8 IC42.H9 IC42.J4 IC42.J5 IC42.J7 IC42.J8 IC42.K4 IC42.K5 IC42.K7 IC42.K8 IC42.L4 IC42.L8 IC42.P6 IC42.R6 IC43.E4 IC43.E8 IC43.F4 IC43.F5 IC43.F7 IC43.F8 IC43.G4 IC43.G5 IC43.G7 IC43.G8 IC43.H3 IC43.H4 IC43.H5 IC43.H7 IC43.H8 IC43.H9 IC43.J4 IC43.J5 IC43.J7 IC43.J8 IC43.K4 IC43.K5 IC43.K7 IC43.K8 IC43.L4 IC43.L8 IC43.P6 IC43.R6 IC45.2 IC47.1 L15.2 Q3.1 R16.2 R95.2 R97.2 R138.2 R159.2 R202.2 R203.2 R208.2 R213.2 R241.2 | length 46.8
  Top Layer w0.32: v1(65,-5) IC33.AP23@65.5,-4.5 ; v1(65,6) IC33.AP13@65.5,5.5 ; v1(66,-8) IC33.AN26@66.5,-7.5 ; v1(67,-11) IC33.AM29@67.5,-10.5 ; v1(67,-1) IC33.AM19@67.5,-0.5 ; v1(68,-4) IC33.AL22@68.5,-3.5 ; v1(68,7) IC33.AL12@68.5,6.5 ; v1(69,-7) IC33.AK25@69.5,-6.5 ; v1(70,-10) IC33.AJ28@70.5,-9.5 ; v1(71,-3) IC33.AH21@71.5,-2.5 ; v1(71,8) IC33.AH11@71.5,7.5 ; v1(72,5) IC33.AG14@72.5,4.5 ; v1(74,-2) IC33.AE20@74.5,-1.5 ; v1(75,6) IC33.AD13@75.5,5.5 ; IC33.R30@84.5,-11.5 v1(85,-12) ; IC33.P33@85.5,-14.5 v1(86,-15) ; IC33.N26@86.5,-7.5 v1(87,-8) ; IC33.M29@87.5,-10.5 v1(88,-11) ; IC33.L32@88.5,-13.5 v1(89,-14) ; IC33.K25@89.5,-6.5 v1(90,-7) ; IC33.K15@89.5,3.5 v1(90,4) ; IC33.J28@90.5,-9.5 v1(91,-10) ; IC33.J18@90.5,0.5 v1(91,0) ; IC33.H31@91.5,-12.5 v1(92,-13) ; IC33.H21@91.5,-2.5 v1(92,-3) ; IC33.G34@92.5,-15.5 v1(93,-16) ; IC33.F27@93.5,-8.5 v1(94,-9) ; IC33.F17@93.5,1.5 v1(94,2) ; IC33.E30@94.5,-11.5 v1(95,-12) ; IC33.E20@94.5,-1.5 v1(95,-2) ; IC33.D33@95.5,-14.5 v1(96,-15) ; IC33.D23@95.5,-4.5 v1(96,-5) ; IC33.C26@96.5,-7.5 v1(97,-8) ; IC33.C16@96.5,2.5 v1(97,3) ; IC33.B29@97.5,-10.5 v1(98,-11) ; IC33.B19@97.5,-0.5 98,-1 v1(98,-0.95) ; IC33.A32@98.5,-13.5 v1(99,-14) ; IC33.A22@98.5,-3.5 v1(99,-4) ; v1(120.25,-3.9) IC42.H9@120.75,-3.4 ; v1(121.25,-6.9) IC42.E8@121.75,-6.4 ; v1(121.25,-5.9) IC42.F8@121.75,-5.4 ; v1(121.25,-4.9) IC42.G8@121.75,-4.4 ; v1(121.25,-3.9) IC42.H8@121.75,-3.4 ; v1(121.25,-1.9) IC42.J8@121.75,-2.4 ; v1(121.25,-0.9) IC42.K8@121.75,-1.4 ; v1(121.25,0.1) IC42.L8@121.75,-0.4 ; v1(122.25,-5.9) IC42.F7@122.75,-5.4 ; v1(122.25,-4.9) IC42.G7@122.75,-4.4 ; v1(122.25,-3.9) IC42.H7@122.75,-3.4 ; v1(122.25,-1.9) IC42.J7@122.75,-2.4 ; v1(122.25,-0.9) IC42.K7@122.75,-1.4 ; v1(123.25,3.1) IC42.P6@123.75,2.6 ; v1(123.25,4.1) IC42.R6@123.75,3.6 ; IC42.F5@124.75,-5.4 v1(125.25,-5.9) ; IC42.G5@124.75,-4.4 v1(125.25,-4.9) ; IC42.H5@124.75,-3.4 v1(125.25,-3.9) ; IC42.J5@124.75,-2.4 v1(125.25,-1.9) ; IC42.K5@124.75,-1.4 v1(125.25,-0.9) ; IC42.E4@125.75,-6.4 v1(126.25,-6.9) ; IC42.F4@125.75,-5.4 v1(126.25,-5.9) ; IC42.G4@125.75,-4.4 v1(126.25,-4.9) ; IC42.H4@125.75,-3.4 v1(126.25,-3.9) ; IC42.J4@125.75,-2.4 126.25,-1.9 v1(126.2,-1.9) ; IC42.K4@125.75,-1.4 v1(126.25,-0.9) ; IC42.L4@125.75,-0.4 v1(126.25,0.1) ; IC42.H3@126.75,-3.4 v1(127.25,-3.9)
+2AV5: C87.1 C88.1 IC33.T18 L5.1 | length 0.7
  Top Layer w0.32: IC33.T18@83.5,0.5 v1(84,0)
+2V5: C64.2 C65.2 C66.2 C83.1 C84.2 C85.2 C86.2 C217.2 C259.1 C260.1 C268.1 C269.2 C270.1 C271.1 C299.1 CN2.2 CN2.4 CN2.6 IC24.2 IC24.10 IC32.4 IC33.A12 IC33.AA10 IC33.AA22 IC33.AA32 IC33.AB9 IC33.AB29 IC33.AC16 IC33.AC26 IC33.AD23 IC33.AD33 IC33.AE10 IC33.AE30 IC33.AF17 IC33.AF27 IC33.AG24 IC33.AG34 IC33.AH31 IC33.AJ8 IC33.AJ18 IC33.AK15 IC33.AL32 IC33.AM9 IC33.AN16 IC33.B9 IC33.D13 IC33.E10 IC33.G14 IC33.G24 IC33.H11 IC33.L12 IC33.L22 IC33.M9 IC33.N10 IC33.N22 IC33.P9 IC33.P23 IC33.R22 IC33.T9 IC33.T27 IC33.U22 IC33.U24 IC33.U34 IC33.V9 IC33.V31 IC33.W10 IC33.W22 IC33.W28 IC33.Y9 IC33.Y23 IC33.Y25 IC34.4 IC35.4 IC36.A4 IC36.C6 IC36.D5 IC36.D6 IC36.G4 IC37.1 IC37.4 IC39.4 IC46.7 IC47.6 J1.81 J3.29 J3.31 L5.2 L14.2 P5.2 Q2.3 R17.2 R18.2 R19.2 R44.2 R45.1 R46.2 R47.2 R48.2 R49.2 R51.1 R52.1 R53.1 R54.2 R55.2 R56.2 R57.2 R58.2 R128.2 R129.2 R181.1 R190.1 R191.1 R195.2 R206.2 R207.1 R211.2 R239.1 | length 35.4
  Top Layer w0.32: v1(66,3) IC33.AN16@66.5,2.5 ; v1(67,10) IC33.AM9@67.5,9.5 ; v1(68,-14) IC33.AL32@68.5,-13.5 ; v1(69,4) IC33.AK15@69.5,3.5 ; v1(70,0) IC33.AJ18@70.5,0.5 ; v1(70,11) IC33.AJ8@70.5,10.5 ; v1(71,-13) IC33.AH31@71.5,-12.5 ; v1(72,-16) IC33.AG34@72.5,-15.5 ; v1(72,-6) IC33.AG24@72.5,-5.5 ; v1(73,-9) IC33.AF27@73.5,-8.5 ; v1(73,2) IC33.AF17@73.5,1.5 ; v1(74,-12) IC33.AE30@74.5,-11.5 ; v1(74,9) IC33.AE10@74.5,8.5 ; v1(75,-15) IC33.AD33@75.5,-14.5 ; v1(75,-5) IC33.AD23@75.5,-4.5 ; v1(76,-8) IC33.AC26@76.5,-7.5 ; v1(76,3) IC33.AC16@76.5,2.5 ; v1(77,-11) IC33.AB29@77.5,-10.5 ; v1(77,10) IC33.AB9@77.5,9.5 ; v1(78,-14) IC33.AA32@78.5,-13.5 ; v1(78,-4) IC33.AA22@78.5,-3.5 ; v1(78,9) IC33.AA10@78.5,8.5 ; v1(79,-7) IC33.Y25@79.5,-6.5 ; v1(79,-5) IC33.Y23@79.5,-4.5 ; v1(79,10) IC33.Y9@79.5,9.5 ; v1(80,-10) IC33.W28@80.5,-9.5 ; v1(80,-4) IC33.W22@80.5,-3.5 ; v1(80,9) IC33.W10@80.5,8.5 ; v1(81,-13) IC33.V31@81.5,-12.5 ; v1(81,10) IC33.V9@81.5,9.5 ; IC33.U34@82.5,-15.5 v1(83,-16) ; IC33.U24@82.5,-5.5 v1(83,-6) ; IC33.U22@82.5,-3.5 v1(83,-4) ; IC33.T27@83.5,-8.5 v1(84,-9) ; IC33.T9@83.5,9.5 v1(84,10) ; IC33.R22@84.5,-3.5 v1(85,-4) ; IC33.P23@85.5,-4.5 v1(86,-5) ; IC33.P9@85.5,9.5 v1(86,10) ; IC33.N22@86.5,-3.5 v1(87,-4) ; IC33.N10@86.5,8.5 v1(87,9) ; IC33.M9@87.5,9.5 v1(88,10) ; IC33.L22@88.5,-3.5 v1(89,-4) ; IC33.L12@88.5,6.5 v1(89,7) ; IC33.H11@91.5,7.5 v1(92,8) ; IC33.G24@92.5,-5.5 v1(93,-6) ; IC33.G14@92.5,4.5 v1(93,5) ; IC33.E10@94.5,8.5 v1(95,9) ; IC33.D13@95.5,5.5 v1(96,6) ; IC33.B9@97.5,9.5 v1(98,10) ; IC33.A12@98.5,6.5 v1(99,7)
+2V5_PLL: C167.1 C169.2 C171.2 C172.2 C263.2 C264.2 IC16.27 IC16.41 IC16.54 IC34.8 R188.1
+2V5_PLL_PG: IC33.AK14 IC34.2 R190.2 | length 0.7
  Top Layer w0.32: v1(69,5) IC33.AK14@69.5,4.5
+3V0_OSC: C235.2 IC7.2 IC38.5 L2.2 L3.2 L9.2 R145.2
+3V0_VM53: C33.1 C35.1 C236.2 IC4.4 IC23.4 IC44.5
+3V0_VM53_EN: IC33.AN15 IC44.3 R211.1 | length 0.7
  Top Layer w0.32: v1(66,4) IC33.AN15@66.5,3.5
+3V3: C3.2 C4.2 C8.1 C11.1 C12.1 C14.1 C15.1 C27.2 C29.2 C30.2 C50.1 C51.2 C57.2 C58.2 C59.2 C144.1 C146.2 C148.2 C151.1 C152.2 C153.2 C159.1 C191.1 C192.1 C193.1 C194.1 C218.2 C219.1 C220.2 C221.2 C222.2 C223.1 C224.1 C225.1 C226.1 C227.1 C228.1 C229.1 C230.1 C231.1 C232.1 C233.1 C234.1 C242.1 C244.1 C250.2 C252.2 C275.1 C283.2 C287.2 C309.1 C417.1 CN2.1 CN2.3 CN2.5 D1.1 IC1.A17 IC1.C17 IC1.H8 IC1.K10 IC1.K12 IC1.L10 IC1.L11 IC1.T1 IC2.10 IC9.8 IC10.5 IC11.5 IC12.9 IC12.10 IC12.12 IC12.13 IC12.14 IC13.1 IC13.4 IC13.7 IC13.27 IC13.30 IC14.1 IC14.4 IC14.7 IC14.27 IC14.30 IC15.8 IC17.3 IC17.4 IC18.3 IC18.4 IC19.4 IC19.5 IC20.4 IC21.1 IC22.4 IC24.19 IC25.3 IC25.6 IC26.5 IC27.12 IC27.37 IC29.A7 IC29.B2 IC29.B7 IC29.C9 IC29.D9 IC29.E1 IC29.F9 IC29.L1 IC29.L7 IC29.M9 IC29.N9 IC29.P2 IC29.P7 IC29.R7 IC31.16 IC34.1 IC38.1 IC38.3 IC44.1 IC45.7 IC45.10 IC48.8 IC49.8 L1.1 L6.2 L7.2 L12.2 P2.1 P6.1 P6.2 R7.2 R8.2 R9.2 R10.2 R11.2 R12.2 R13.2 R14.2 R15.2 R28.2 R38.2 R116.2 R160.1 R161.1 R162.1 R165.2 R166.2 R167.2 R168.2 R169.2 R170.2 R201.2 R214.2 R237.2
+3V3_PG: IC33.AJ15 IC48.2 R239.2 | length 0.7
  Top Layer w0.32: v1(70,4) IC33.AJ15@70.5,3.5
+3V3_PHY: C68.2 C162.2 C208.1 C209.1 C212.1 C213.1 C215.1 C216.1 IC40.4 IC41.1 IC41.19 L12.1 R154.2 R155.2 R156.2 R157.2 Tr1.2 Tr1.7
+3V3_PLL: C173.2 C174.2 C175.1 C176.2 C177.2 C178.2 C180.2 C181.2 C183.2 C184.2 C186.2 C187.2 C266.2 C267.2 IC16.1 IC16.11 IC16.12 IC16.24 IC16.30 IC16.31 IC16.32 IC16.38 IC16.49 IC16.50 IC16.51 IC16.57 IC16.60 IC16.61 IC35.8 L8.2 R189.1
+3V3_PLL_PG: IC33.AF15 IC35.2 R191.2 | length 0.7
  Top Layer w0.32: v1(73,4) IC33.AF15@73.5,3.5
+5VCC_IN: C239.1 C248.1 C249.1 C251.2 C254.1 C255.2 C257.1 C258.1 C274.2 C276.2 C277.1 C278.1 C279.1 C280.1 C281.2 C298.2 C303.2 C304.1 C305.1 C306.1 C307.1 C322.2 IC32.3 IC34.3 IC35.1 IC35.3 IC37.3 IC39.3 IC46.17 IC46.24 IC47.17 IC48.1 IC48.3 J2.81 J2.82 J2.83 J2.84 J2.85 J2.86 J2.87 J2.88 J2.89 J2.90 J2.91 J2.92 J2.93 J2.94 J2.95 J2.96 J4.1 R243.2 T2.5 T2.6 T3.5 T3.6 T4.5 T4.6 T5.5 T5.6
A0: IC33.AL8 IC36.A1 | length 0.7
  Top Layer w0.175: v1(68,11) IC33.AL8@68.5,10.5
A1: IC33.AK8 IC36.B1 | length 0.7
  Top Layer w0.175: v1(69,11) IC33.AK8@69.5,10.5
A2: IC33.AC9 IC36.C1 | length 0.7
  Top Layer w0.175: v1(76,10) IC33.AC9@76.5,9.5
A3: IC33.AD10 IC36.D1 | length 0.7
  Top Layer w0.175: v1(75,9) IC33.AD10@75.5,8.5
A4: IC33.C8 IC36.D2 | length 0.7
  Top Layer w0.175: IC33.C8@96.5,10.5 v1(97,11)
A5: IC33.B8 IC36.A2
A6: IC33.E9 IC36.C2 | length 0.7
  Top Layer w0.175: IC33.E9@94.5,9.5 v1(95,10)
A7: IC33.E8 IC36.A3 | length 0.7
  Top Layer w0.175: IC33.E8@94.5,10.5 v1(95,11)
A8: IC33.A8 IC36.B3
A9: IC33.A9 IC36.C3
A10: IC33.D9 IC36.D3 | length 0.7
  Top Layer w0.175: IC33.D9@95.5,9.5 v1(96,10)
A11: IC33.C9 IC36.C4 | length 0.7
  Top Layer w0.175: IC33.C9@96.5,9.5 v1(97,10)
A12: IC33.D10 IC36.A5 | length 0.8
  Top Layer w0.175: IC33.D10@95.5,8.5 96,9 v1(95.946,9.054)
A13: IC33.C10 IC36.B5 | length 0.7
  Top Layer w0.175: IC33.C10@96.5,8.5 v1(97,9)
A14: IC33.F10 IC36.C5 | length 0.7
  Top Layer w0.175: IC33.F10@93.5,8.5 v1(94,9)
A15: IC33.F9 IC36.D7 | length 0.7
  Top Layer w0.175: IC33.F9@93.5,9.5 v1(94,10)
A16: IC33.AH8 IC36.D8 | length 0.7
  Top Layer w0.175: v1(71,11) IC33.AH8@71.5,10.5
A17: IC33.AG8 IC36.A7 | length 0.7
  Top Layer w0.175: v1(72,11) IC33.AG8@72.5,10.5
A18: IC33.AP9 IC36.B7 | length 0.7
  Top Layer w0.175: v1(65,10) IC33.AP9@65.5,9.5
A19: IC33.AN9 IC36.C7 | length 0.7
  Top Layer w0.175: v1(66,10) IC33.AN9@66.5,9.5
A20: IC33.AF10 IC36.C8 | length 0.7
  Top Layer w0.175: v1(73,9) IC33.AF10@73.5,8.5
A21: IC33.AF9 IC36.A8 | length 0.7
  Top Layer w0.175: v1(73,10) IC33.AF9@73.5,9.5
A22: IC33.AL9 IC36.G1 | length 0.7
  Top Layer w0.175: v1(68,10) IC33.AL9@68.5,9.5
A23: IC33.AK9 IC36.H8 | length 0.7
  Top Layer w0.175: v1(69,10) IC33.AK9@69.5,9.5
A24: IC33.AE9 IC36.B6 | length 0.7
  Top Layer w0.175: v1(74,10) IC33.AE9@74.5,9.5
AGND: C88.2 IC33.T17 IC33.U17 IC33.U18 IC33.V17 IC33.V18 L4.2 | length 3.5
  Top Layer w0.32: v1(81,0) IC33.V18@81.5,0.5 ; v1(81,2) IC33.V17@81.5,1.5 ; IC33.U18@82.5,0.5 v1(83,0) ; IC33.U17@82.5,1.5 v1(83,2) ; IC33.T17@83.5,1.5 v1(84,2)
ARM_DMARQ: IC1.H16 IC33.AC22 R52.2 | length 0.7
  Top Layer w0.175: v1(76,-4) IC33.AC22@76.5,-3.5
ARM_FPGA_RESET: IC1.E17 IC33.M10 R184.2 | length 0.7
  Top Layer w0.175: IC33.M10@87.5,8.5 v1(88,9)
ARM_IRQ: IC1.K15 IC33.AC24 R53.2 | length 0.7
  Top Layer w0.175: v1(76,-6) IC33.AC24@76.5,-5.5
ARM_NRST: D6.1 D6.2 IC33.AD22 R51.2 | length 0.7
  Top Layer w0.175: v1(75,-4) IC33.AD22@75.5,-3.5
ARM_PCK3: IC33.N33 R182.2 R183.2 | length 0.7
  Top Layer w0.175: IC33.N33@86.5,-14.5 v1(87,-15)
ARM_PROGRAM_B: D10.2 IC1.L16
ARM_WD_RST: D5.1 IC2.4 S1.1
CLK125MHZ_EXT_N: C179.1 IC9.6 R23.2
CLK125MHZ_EXT_P: C182.1 IC9.7 R24.2
CLK_25MHZ: IC14.21 IC21.5 IC22.3
CLK_25MHZ_IN: IC41.5 R193.2 R194.2
CPU_JTAG.JNRST: D5.3 D6.3 IC1.V15 P6.15 R11.1
CPU_JTAG.JNTRST: IC1.U16 P6.3 R3.1 R7.1
CPU_JTAG.JRTCK: IC1.U15 P6.11 R10.1
CPU_JTAG.JTCK: IC1.R17 P6.9
CPU_JTAG.JTDI: IC1.P17 P6.5 R8.1
CPU_JTAG.JTDO: IC1.N18 P6.13
CPU_JTAG.JTMS: IC1.N17 P6.7 R9.1
CPU_LED1: DS1.2 IC1.M18
CPU_LED2: DS1.4 IC1.L15
CPU_MISO: IC1.H18 IC24.20
CPU_MOSI: IC1.H15 IC24.18
CPU_NPCS0: IC1.H14 IC24.16
CPU_SPCK: IC1.H17 IC24.17
CPU_SSC.RD1: IC1.J13 J2.23
CPU_SSC.RF1: IC1.J12 J2.27
CPU_SSC.RK1: IC1.J14 J2.25
CPU_SSC.TD1: IC1.J18 J2.21
CPU_SSC.TF1: IC1.J16 J2.17
CPU_SSC.TK1: IC1.J17 J2.19
CRS_DV: IC1.D11 Q3.3 R201.1
CRS_DV_1V8: IC41.11 Q3.2 R202.1
D0: IC33.AF24 IC36.F2 | length 0.7
  Top Layer w0.175: v1(73,-6) IC33.AF24@73.5,-5.5
D1: IC33.AF25 IC36.E2 | length 0.7
  Top Layer w0.175: v1(73,-7) IC33.AF25@73.5,-6.5
D2: IC33.W24 IC36.G3 | length 0.7
  Top Layer w0.175: v1(80,-6) IC33.W24@80.5,-5.5
D3: IC33.V24 IC36.E4 | length 0.7
  Top Layer w0.175: v1(81,-6) IC33.V24@81.5,-5.5
D4: IC33.H24 IC36.E5 | length 0.7
  Top Layer w0.175: IC33.H24@91.5,-5.5 v1(92,-6)
D5: IC33.H25 IC36.G5 | length 0.7
  Top Layer w0.175: IC33.H25@91.5,-6.5 v1(92,-7)
D6: IC33.P24 IC36.G6 | length 0.7
  Top Layer w0.175: IC33.P24@85.5,-5.5 v1(86,-6)
D7: IC33.R24 IC36.H7 | length 0.7
  Top Layer w0.175: IC33.R24@84.5,-5.5 v1(85,-6)
D8: IC33.G23 IC36.E1 | length 0.7
  Top Layer w0.175: IC33.G23@92.5,-4.5 v1(93,-5)
D9: IC33.H23 IC36.E3 | length 0.7
  Top Layer w0.175: IC33.H23@91.5,-4.5 v1(92,-5)
D10: IC33.N24 IC36.F3 | length 0.7
  Top Layer w0.175: IC33.N24@86.5,-5.5 v1(87,-6)
D11: IC33.N23 IC36.F4 | length 0.7
  Top Layer w0.175: IC33.N23@86.5,-4.5 v1(87,-5)
D12: IC33.F23 IC36.F5 | length 0.7
  Top Layer w0.175: IC33.F23@93.5,-4.5 v1(94,-5)
D13: IC33.F24 IC36.H5 | length 0.7
  Top Layer w0.175: IC33.F24@93.5,-5.5 v1(94,-6)
D14: IC33.L24 IC36.G7 | length 0.7
  Top Layer w0.175: IC33.L24@88.5,-5.5 v1(89,-6)
D15: IC33.M23 IC36.E7 | length 0.7
  Top Layer w0.175: IC33.M23@87.5,-4.5 v1(88,-5)
DAC_CONTROL.DAC_DMTD_DIN: IC33.AN17 R148.2 | length 0.7
  Top Layer w0.175: v1(66,2) IC33.AN17@66.5,1.5
DAC_CONTROL.DAC_DMTD_SCLK: IC33.AH17 R149.2 | length 0.7
  Top Layer w0.175: v1(71,2) IC33.AH17@71.5,1.5
DAC_CONTROL.DAC_DMTD_SYNC: IC33.AM17 R150.2 | length 0.7
  Top Layer w0.175: v1(67,2) IC33.AM17@67.5,1.5
DAC_CONTROL.DAC_REF_DIN: IC33.AP17 R21.2 | length 0.7
  Top Layer w0.175: v1(65,2) IC33.AP17@65.5,1.5
DAC_CONTROL.DAC_REF_SCLK: IC33.AC15 R140.2 | length 0.7
  Top Layer w0.175: v1(76,4) IC33.AC15@76.5,3.5
DAC_CONTROL.DAC_REF_SYNC: IC33.AD17 R141.2 | length 0.7
  Top Layer w0.175: v1(75,2) IC33.AD17@75.5,1.5
DIN: IC33.H8 R177.2 R179.1 | length 0.7
  Top Layer w0.175: IC33.H8@91.5,10.5 v1(92,11)
DMTD_CLK_N: IC13.5 IC33.M22 | length 0.7
  Top Layer w0.125: IC33.M22@87.5,-3.5 v1(88,-4)
DMTD_CLK_P: IC13.6 IC33.L23 | length 0.7
  Top Layer w0.125: IC33.L23@88.5,-4.5 v1(89,-5)
DMTDCLK_MB_N: IC13.2 J1.95
DMTDCLK_MB_P: IC13.3 J1.93
DONE: IC33.R8 Q1.1 R46.1 | length 0.7
  Top Layer w0.175: IC33.R8@84.5,10.5 v1(85,11)
EBI0_A2: IC1.D9 IC29.G8
EBI0_A3: IC1.C9 IC29.G9
EBI0_A4: IC1.B9 IC29.F7
EBI0_A5: IC1.A8 IC29.F3
EBI0_A6: IC1.F9 IC29.G1
EBI0_A7: IC1.B8 IC29.G2
EBI0_A8: IC1.C8 IC29.G3
EBI0_A9: IC1.D8 IC29.H1
EBI0_A10: IC1.A7 IC29.H2
EBI0_A11: IC1.A6 IC29.J3
EBI0_A12: IC1.F8
EBI0_A13: IC1.C7 IC29.H9
EBI0_A14: IC1.E7 IC29.H3
EBI0_A15: IC1.B7
EBI0_BA0: IC1.F7 IC29.J7
EBI0_BA1: IC1.D6 IC29.H8
EBI0_CAS: IC1.B3 IC29.K7
EBI0_D0: IC1.C2 IC27.29 IC29.R8
EBI0_D1: IC1.D4 IC27.30 IC29.N7
EBI0_D2: IC1.A1 IC27.31 IC29.R9
EBI0_D3: IC1.D2 IC27.32 IC29.N8
EBI0_D4: IC1.B1 IC27.41 IC29.P9
EBI0_D5: IC1.E3 IC27.42 IC29.M8
EBI0_D6: IC1.C1 IC27.43 IC29.M7
EBI0_D7: IC1.E2 IC27.44 IC29.L8
EBI0_D8: IC1.E4 IC29.L2
EBI0_D9: IC1.F3 IC29.M3
EBI0_D10: IC1.D1 IC29.M2
EBI0_D11: IC1.F4 IC29.P1
EBI0_D12: IC1.F5 IC29.N2
EBI0_D13: IC1.F2 IC29.R1
EBI0_D14: IC1.G4 IC29.N3
EBI0_D15: IC1.E1 IC29.R2
EBI0_D16: IC1.H7 IC29.E8
EBI0_D17: IC1.G1 IC29.D7
EBI0_D18: IC1.J5 IC29.D8
EBI0_D19: IC1.J4 IC29.B9
EBI0_D20: IC1.J8 IC29.C8
EBI0_D21: IC1.J7 IC29.A9
EBI0_D22: IC1.J3 IC29.C7
EBI0_D23: IC1.J6 IC29.A8
EBI0_D24: IC1.H1 IC29.A2
EBI0_D25: IC1.K8 IC29.C3
EBI0_D26: IC1.J2 IC29.A1
EBI0_D27: IC1.K5 IC29.C2
EBI0_D28: IC1.K2 IC29.B1
EBI0_D29: IC1.K7 IC29.D2
EBI0_D30: IC1.J1 IC29.D3
EBI0_D31: IC1.K6 IC29.E2
EBI0_NBS0: IC1.E9 IC29.K9
EBI0_NBS1: IC1.E5 IC29.K1
EBI0_NBS2: IC1.A9 IC29.F8
EBI0_NBS3: IC1.B5 IC29.F2
EBI0_NCS0: IC1.F6
EBI0_RAS: IC1.B4 IC29.J9
EBI0_SDA10: IC1.E8 IC29.G7
EBI0_SDCK: IC1.C5 IC29.J1
EBI0_SDCKE: IC1.A2 IC29.J2
EBI0_SDCS: IC1.A4 IC29.J8
EBI0_SDWE: IC1.C4 IC29.K8
EBI1_A0: IC1.U6 IC33.R29 | length 0.7
  Top Layer w0.175: IC33.R29@84.5,-10.5 v1(85,-11)
EBI1_A1: IC1.V5 IC33.P29 | length 0.7
  Top Layer w0.175: IC33.P29@85.5,-10.5 v1(86,-11)
EBI1_A2: IC1.R6 IC33.P34 | length 0.7
  Top Layer w0.175: IC33.P34@85.5,-15.5 v1(86,-16)
EBI1_A3: IC1.V6 IC33.N34 | length 0.7
  Top Layer w0.175: IC33.N34@86.5,-15.5 v1(87,-16)
EBI1_A4: IC1.P8 IC33.N30 | length 0.7
  Top Layer w0.175: IC33.N30@86.5,-11.5 v1(87,-12)
EBI1_A5: IC1.U7 IC33.M30 | length 0.7
  Top Layer w0.175: IC33.M30@87.5,-11.5 v1(88,-12)
EBI1_A6: IC1.N7 IC33.L34 | length 0.7
  Top Layer w0.175: IC33.L34@88.5,-15.5 v1(89,-16)
EBI1_A7: IC1.T7 IC33.K34 | length 0.7
  Top Layer w0.175: IC33.K34@89.5,-15.5 v1(90,-16)
EBI1_A8: IC1.P7 IC33.T26 | length 0.7
  Top Layer w0.175: IC33.T26@83.5,-7.5 v1(84,-8)
EBI1_A9: IC1.V7 IC33.R26 | length 0.7
  Top Layer w0.175: IC33.R26@84.5,-7.5 v1(85,-8)
EBI1_A10: IC1.U8 IC33.R32 | length 0.7
  Top Layer w0.175: IC33.R32@84.5,-13.5 v1(85,-14)
EBI1_A11: IC1.N8 IC33.R31 | length 0.7
  Top Layer w0.175: IC33.R31@84.5,-12.5 v1(85,-13)
EBI1_A12: IC1.T8 IC33.R27 | length 0.7
  Top Layer w0.175: IC33.R27@84.5,-8.5 v1(85,-9)
EBI1_A13: IC1.R8 IC33.R28 | length 0.7
  Top Layer w0.175: IC33.R28@84.5,-9.5 v1(85,-10)
EBI1_A14: IC1.R7 IC33.P26 | length 0.7
  Top Layer w0.175: IC33.P26@85.5,-7.5 v1(86,-8)